# Altium PCB Game of Simon.PcbDoc
Units mm, origin at the board's own origin, x right, y up, seen from the top; angles counter-clockwise.
Board outline 80 x 49 mm, 2 copper layers (Top Layer, Bottom Layer), stack 1.671 mm thick; 15 components, 14 nets, 77 pads, 1 vias.
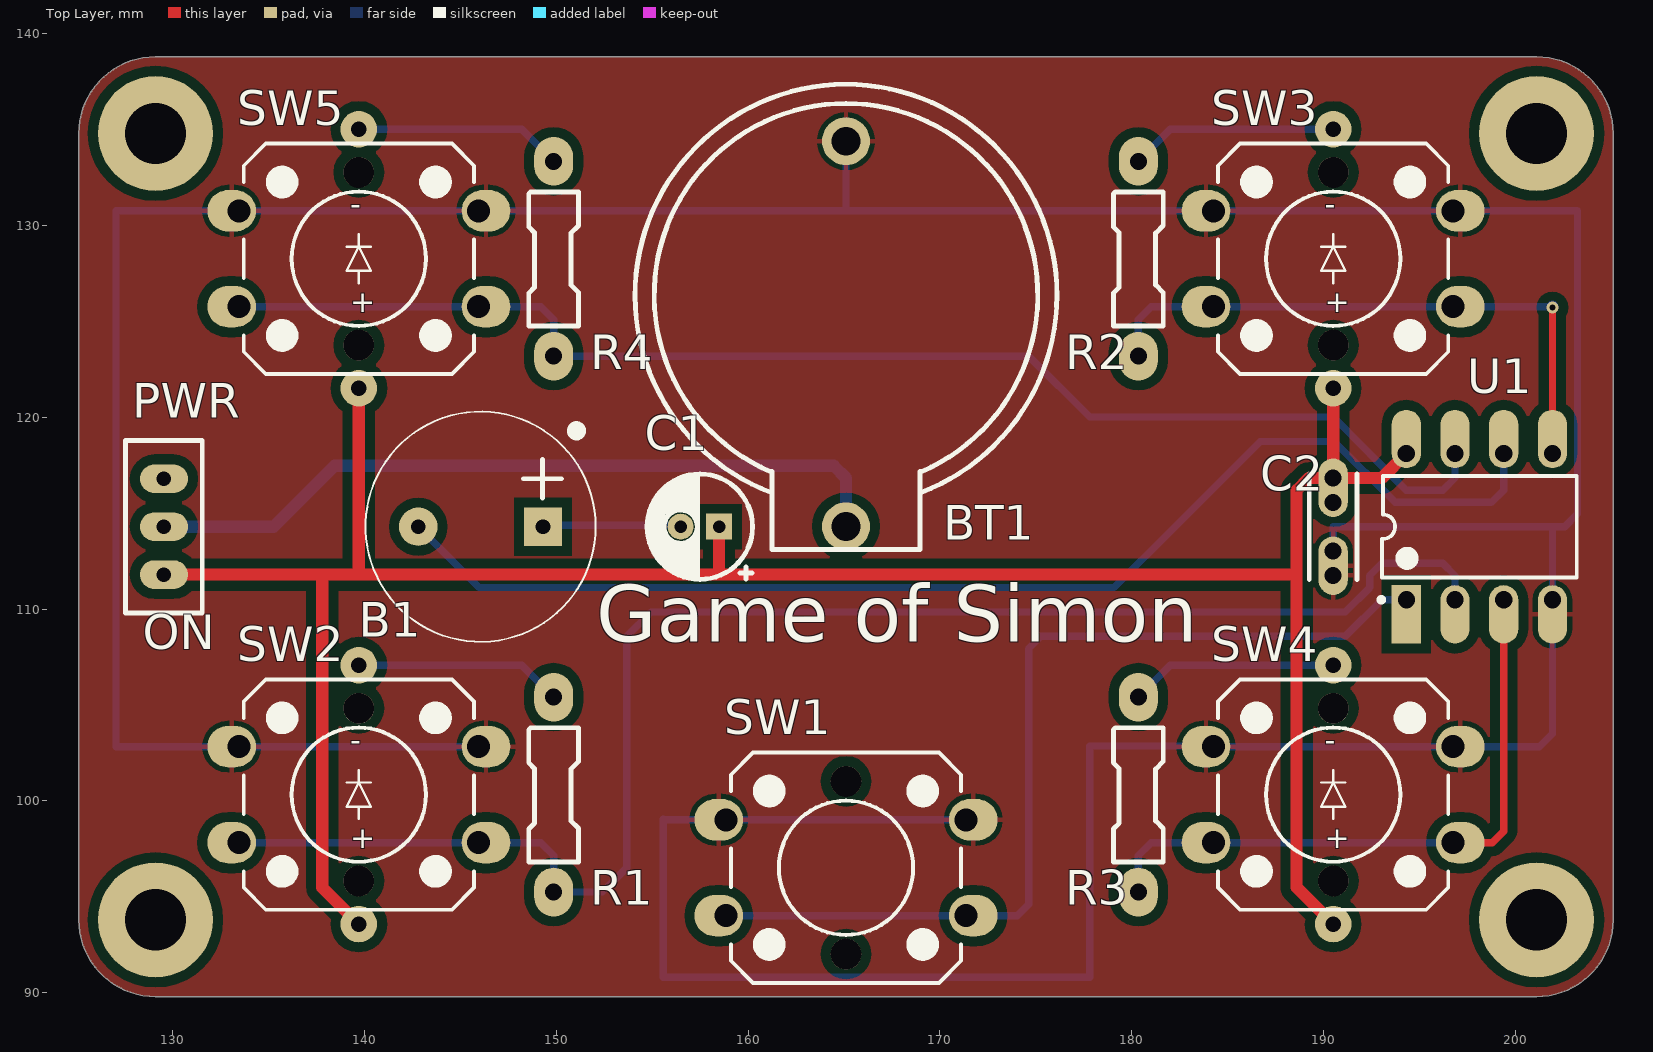
[diagram p0: Top Layer view]
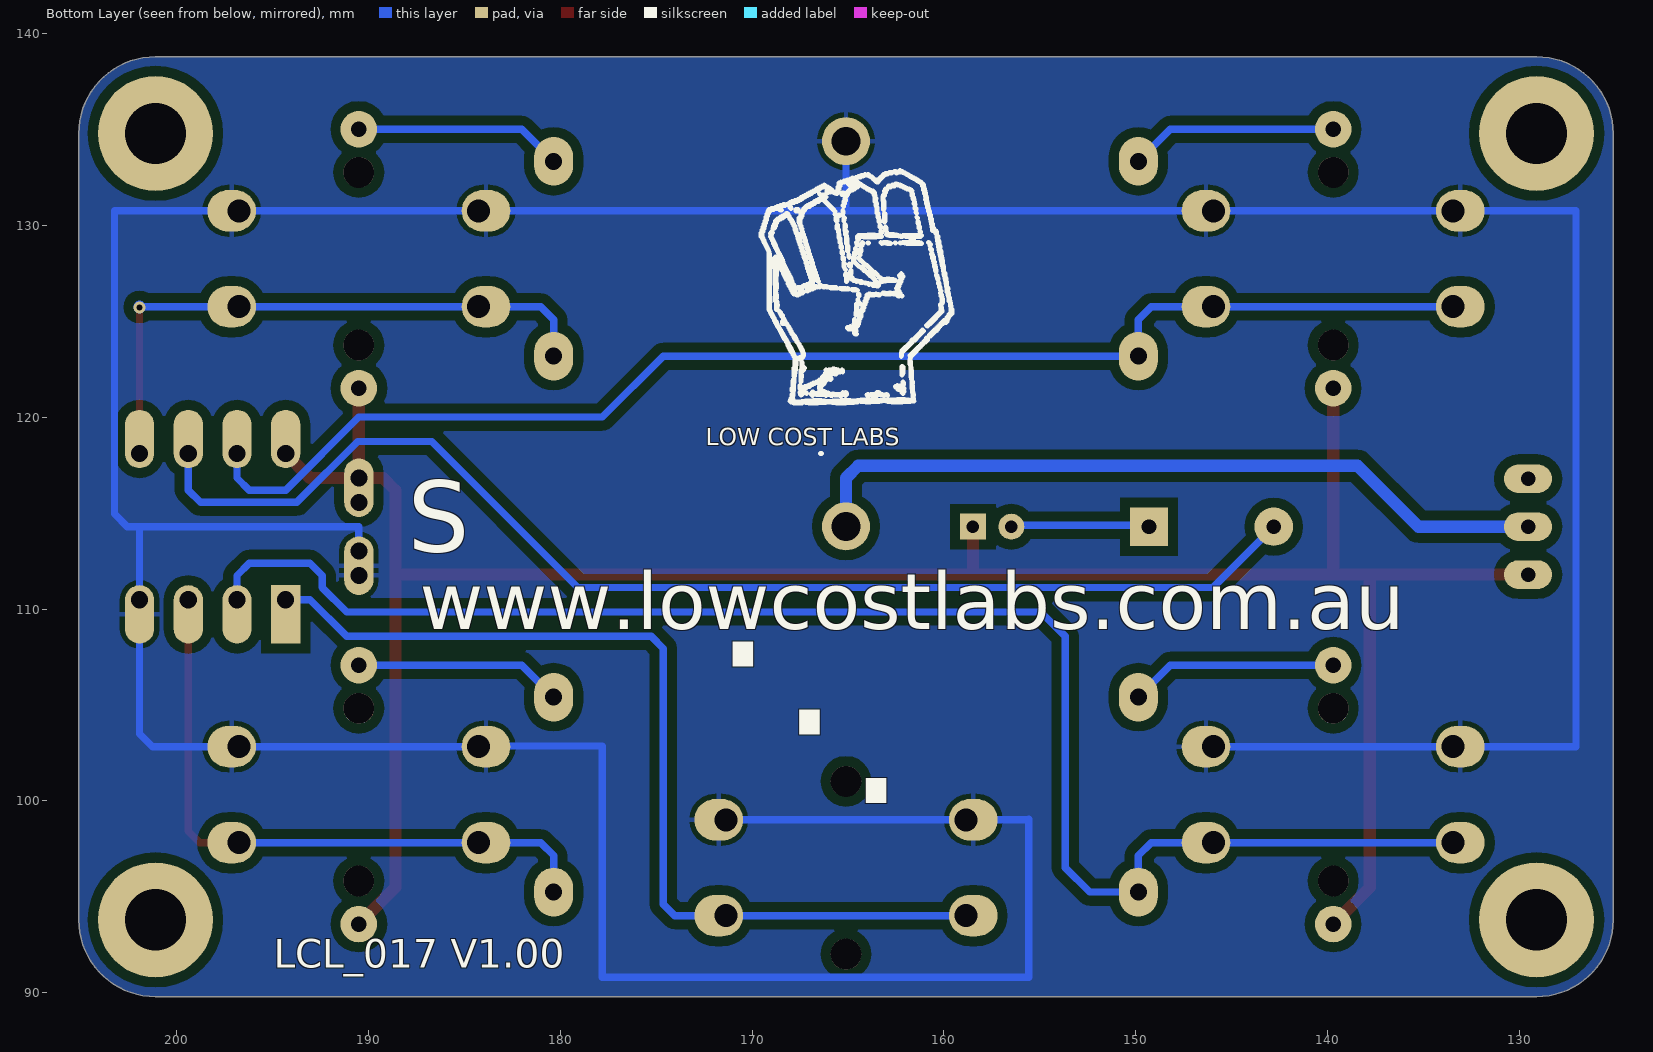
[diagram p1: Bottom Layer view, seen from below]
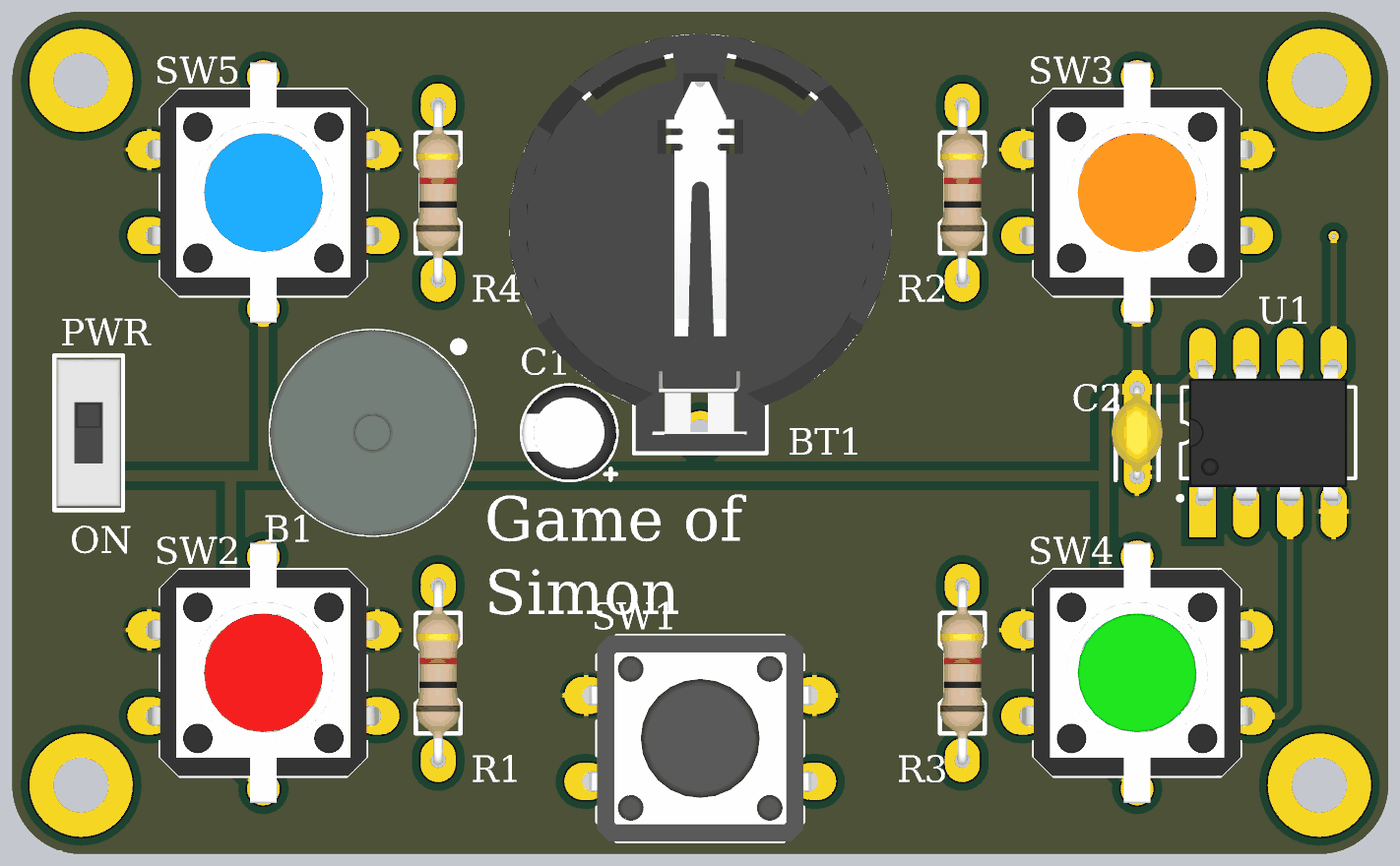
[diagram p2: 3D render of the assembled board from above, using the file's embedded part models]

## Layer stack, top to bottom
Top Solder: solder mask 0.0102, Solder Resist, Dk 3.5
Top Layer: signal copper 0.0356
Dielectric 1: dielectric 1.6, FR-4, Dk 4.8
Bottom Layer: signal copper 0.0356
Bottom Solder: solder mask 0.0102, Solder Resist, Dk 3.5

## Board outline
125.1,93.8 ccw(c129.1,93.8) 129.1,89.8 201.1,89.8 ccw(c201.1,93.8) 205.1,93.8 205.1,134.8 ccw(c201.1,134.8) 201.1,138.8 129.1,138.8 ccw(c129.1,134.8) 125.1,134.8

## Design rules (kind name [scope] priority, off if disabled: settings)
Clearance Poly_GND [inPolygon vs not innet (gnd)] p1: gap=0.508
Clearance [All] p2: gap=0.203
HoleSize [All] p1 off: absolutevalues=TRUE maxlimit=2.54 minlimit=0.025 maxpercent=80.000 minpercent=20.000
HoleSize Testpoint [All] p2 off: absolutevalues=TRUE maxlimit=2.54 minlimit=0.025 maxpercent=80.000 minpercent=20.000
HoleSize TestPointUsage [All] p3 off: absolutevalues=TRUE maxlimit=2.54 minlimit=0.025 maxpercent=80.000 minpercent=20.000
HoleToHoleClearance [All] p1 off: gap=0.254 allowstackedmicrovias=TRUE
LayerPairs [All] p1 off: enforce=TRUE
MinimumSolderMaskSliver [All] p1 off: minsoldermaskwidth=0.254
MinimumSolderMaskSliver SilkscreenOverComponentPads [All] p2 off: minsoldermaskwidth=0.254
NetAntennae [All] p1 off: netantennaetolerance=0
PolygonConnect [All] p1: connectstyle=Relief reliefconductorwidth=0.254 reliefentries=4 polygonreliefangle="90 Angle" airgapwidth=0.254
RoomDefinition U_PSU [InComponentClass('U_PSU')] p1: confinementstyle=ConfineIn formatcopy=TRUE lockcomponents=FALSE outline 25,25 105,25 105,75 25,75
RoomDefinition U_Peripherals [InComponentClass('U_Peripherals')] p2: confinementstyle=ConfineIn formatcopy=TRUE lockcomponents=FALSE outline 25,25 105,25 105,75 25,75
RoomDefinition U_Micro [InComponentClass('U_Micro')] p3: confinementstyle=ConfineIn formatcopy=TRUE lockcomponents=FALSE outline 25,25 105,25 105,75 25,75
RoomDefinition U_Bus [InComponentClass('U_Bus')] p4: confinementstyle=ConfineIn formatcopy=TRUE lockcomponents=FALSE outline 25,25 105,25 105,75 25,75
RoomDefinition "4 Button Plate" [InComponentClass('4 Button Plate')] p5: confinementstyle=ConfineIn formatcopy=TRUE lockcomponents=FALSE outline 25,25 105,25 105,75 25,75
RoutingVias [All] p1: holewidth=0.305 width=0.61 viastyle="Through Hole" minholewidth=0.305 minwidth=0.61 maxholewidth=0.711 maxwidth=1.27
SilkToSilkClearance [All] p1 off: silktosilkclearance=0.254
SilkToSolderMaskClearance [IsPad] p1 off: minsilkscreentomaskgap=0.254 clearancetoexposedcopper=TRUE
SolderMaskExpansion [All] p1: expansion=0.102
Width Standard [All] p1: maxlimit=0.635 minlimit=0.203 preferedwidth=0.203
Width Power [inNet('VIN')] p2: maxlimit=2.54 minlimit=0.203 preferedwidth=0.635
23 further rules are at their usual default settings.

## Components (designator, comment, footprint, x,y, rotation, side; value= is the part's Value field where it differs from the comment)
B1 "42R" BUZZER 146.05,114.3 r270 top
BT1 "CR2032 Battery Holder" "CR2032 HOLDER" 165.1,126.365 r270 top
C1 "10uF" "CAP ELECTRO 5mm" 157.48,114.3 r180 top
C2 "10nF" "CAP 0.100\"" 190.5,114.3 r270 top
PWR "SS12D00G3" SS12D00G3 129.54,114.3 r270 top
R1 "1k" "RESISTOR 0.400\"" 149.86,100.33 r270 top
R2 "1k" "RESISTOR 0.400\"" 180.34,128.27 r270 top
R3 "1k" "RESISTOR 0.400\"" 180.34,100.33 r270 top
R4 "1k" "RESISTOR 0.400\"" 149.86,128.27 r270 top
SW1 "12MM TACT SWITCH" "12mm TACT THROUGH HOLE" 165.1,96.52 r0 top
SW2 "TACT RED" "ILLUMINATED TACT RED" 139.7,100.33 r0 top
SW3 "TACT ORANGE" "ILLUMINATED TACT ORANGE" 190.5,128.27 r0 top
SW4 "TACT GREEN" "ILLUMINATED TACT GREEN" 190.5,100.33 r0 top
SW5 "TACT BLUE" "ILLUMINATED TACT BLUE" 139.7,128.27 r0 top
U1 "ATTINY13-20SSU" DIP-8 198.12,114.3 r90 top

## Footprints (in the part's own frame and the unit in brackets; to place one, negate y for a bottom-side part, rotate by r counter-clockwise, add the part's x,y. Pads: shape width x height; smd on the part's side, far side on the other; paste and mask are expansions set on the pad)
"12mm TACT THROUGH HOLE" [mil] "12mm TACT THROUGH HOLE"
  oval 100x85 hole 47.24 copper offset -15,0: 1(-246.06,98.43) 2(-246.06,-98.43)
  oval 100x85 hole 47.24 copper offset 15,0: 1(246.06,98.43) 2(246.06,-98.43)
  round 62.99 hole 62.99: MOUNT(0,-177.17) MOUNT(0,177.17)
  silkscreen extent -236,-236 236,236, body extent -273,-236 273,236, height 335
BUZZER [mm]
  rect 2x2 hole 0.762: 1(0,3.25)
  round 2 hole 0.762: 2(0,-3.25)
  silkscreen extent -6,-6 6,6, body extent -6,-6 6,6, height 8.51
"CAP 0.100\"" [mil]
  round 60 hole 35: 1(-99.99,0) 2(100.01,0)
  oval 120x60 hole 35 copper offset -30,0: 1(-49.99,0)
  oval 120x60 hole 35 copper offset 30,0: 2(50.01,0)
  silkscreen extent -108,-49 108,49, body extent -107,-59 107,59, height 176
"CAP ELECTRO 5mm" [mm]
  rect 1.35x1.35 hole 0.65: 1(-1,0)
  round 1.35 hole 0.65: 2(1,0)
  silkscreen extent -2.75,-2.75 2.75,2.75, body extent -2.75,-2.75 2.75,2.75, height 12.5
"CR2032 HOLDER" [mm]
  round 2.5 hole 1.5: 1(12.05,0) 2(-8.035,0)
  silkscreen extent -11,-11 13.25,11, body extent -11.15,-11.15 13.15,11.15, height 8.5
DIP-8 [mil] "DIP, 14-Pin, Row Spacing 7.62 mm, Pitch 2.54 mm"
  rect 120x60 hole 35 copper offset -30,0: 1(-150,150)
  rrect100% 120x60 hole 35.43 copper offset -30,0: 2(-150,50) 3(-150,-50) 4(-150,-150)
  rrect100% 120x60 hole 35.43 copper offset 30,0: 5(150,-150) 6(150,-50) 7(150,50) 8(150,150)
  silkscreen extent -155,-200 104,206, body extent -155,-181 155,181, height 152
"ILLUMINATED TACT BLUE" [mil]
  oval 100x85 hole 47.24 copper offset -15,0: 1(-246.06,98.43) 2(-246.06,-98.43)
  oval 100x85 hole 47.24 copper offset 15,0: 1(246.06,98.43) 2(246.06,-98.43)
  round 75 hole 31.5: A(0,265.75) K(0,-265.75)
  round 62.99 hole 62.99: MOUNT(0,-177.17) MOUNT(0,177.17)
  silkscreen extent -236,-236 236,236, body extent -264,-298 264,298, height 290
"ILLUMINATED TACT GREEN" [mil]
  oval 100x85 hole 47.24 copper offset -15,0: 1(-246.06,98.43) 2(-246.06,-98.43)
  oval 100x85 hole 47.24 copper offset 15,0: 1(246.06,98.43) 2(246.06,-98.43)
  round 75 hole 31.5: A(0,265.75) K(0,-265.75)
  round 62.99 hole 62.99: MOUNT(0,-177.17) MOUNT(0,177.17)
  silkscreen extent -236,-236 236,236, body extent -264,-298 264,298, height 290
"ILLUMINATED TACT ORANGE" [mil]
  oval 100x85 hole 47.24 copper offset -15,0: 1(-246.06,98.43) 2(-246.06,-98.43)
  oval 100x85 hole 47.24 copper offset 15,0: 1(246.06,98.43) 2(246.06,-98.43)
  round 75 hole 31.5: A(0,265.75) K(0,-265.75)
  round 62.99 hole 62.99: MOUNT(0,-177.17) MOUNT(0,177.17)
  silkscreen extent -236,-236 236,236, body extent -264,-299 264,298, height 290
"ILLUMINATED TACT RED" [mil]
  oval 100x85 hole 47.24 copper offset -15,0: 1(-246.06,98.43) 2(-246.06,-98.43)
  oval 100x85 hole 47.24 copper offset 15,0: 1(246.06,98.43) 2(246.06,-98.43)
  round 75 hole 31.5: A(0,265.75) K(0,-265.75)
  round 62.99 hole 62.99: MOUNT(0,-177.17) MOUNT(0,177.17)
  silkscreen extent -236,-236 236,236, body extent -264,-299 264,298, height 290
"RESISTOR 0.400\"" [mil]
  oval 100x80 hole 35: 1(-200,0) 2(200,0)
  silkscreen extent -137,-51 138,51, body extent -211,-51 211,51, height 106
SS12D00G3 [mm] "SS12D00G3 TOGGLE SWITCH"
  oval 1.5x2.5 hole 0.75: 1(-2.5,0) 2(0,0) 3(2.5,0)
  silkscreen extent -4.5,-2 4.5,2, body extent -4.29,-1.85 4.29,1.85, height 6.97

## Part data
B1: library part BUZZER
BT1: library part CMP-dvcba8mzfnv4aqscf1uc-2, "CR2032 Battery Holder, Through Hole, Horizontal Mount"
C1: library part CMP-su2zmkw1kc3z49ns9isd-1, "5mm Through Hole Electrolytic 2mm Pitch, 5mm height"
C2: library part CMP-f9eb30fd1b76262c-1, "Capacitor, Ceramic, 10000pF, 50VDC, 20-% Tol, 20+% Tol, X7R-TC Code, -15, 15%-TC"
PWR: library part "SS12D00G3 Toggle Switch", "SS12D00G3 Toggle Switch"
R1 R2 R3 R4: library part CMP-iaxfckaaxq3jb0c9euu5-1, "RESISITOR THROUGH HOLE 1/4W"
SW2: "12mm TACT SWITCH RED"
SW3: "12mm TACT SWITCH ORANGE"
SW4: "12mm TACT SWITCH GREEN"
SW5: "ILLUMINATED 12MM TACT SWITCH (BLUE)"
U1: "ATtiny Series 20 MHz 1 KB Flash 64 B SRAM 8-Bit Microcontroller - SOIC-8"

## Free pads (board coordinates)
  round 0.254 on Mech16: 1(294.185,23.293) 1(294.185,23.293) 1(294.199,21.335) 1(294.199,21.335) 1(298.943,25.015) 1(298.943,25.015)
  round 6 hole 3.2: MOUNT(129.1,93.8) MOUNT(129.1,134.8) MOUNT(201.1,93.8) MOUNT(201.1,134.8)

## Via types
v1: diameter 0.61, hole 0.305, Top Layer to Bottom Layer, 1 vias

## Nets (pads, with @x,y where several pads share a name; then routed paths per layer and width w, separated by ;. In a path a pad name is that pad's centre, name@x,y a point inside that pad or via, vN(x,y) a via of type N, cw(c..) or ccw(c..) an arc to the next point about the centre after c; other vN are vias at no path point)
BLUE: R4.2 SW5.2 U1.7 | length 70
  Bottom Layer w0.381: SW5.2@133.45,125.77 145.95,125.77 149.185,125.77 149.86,125.095 R4.2 174.625,123.19 177.8,120.015 190.5,120.015 194.31,116.205 196.215,116.205 196.85,116.84 U1.7
BUZZER: B1.2 U1.6 | length 64.6
  Bottom Layer w0.381: B1.2@142.875,114.3 B1.2 145.975,111.125 179.07,111.125 186.69,118.745 190.555,118.745 193.73,115.57 198.755,115.57 199.39,116.205 U1.6
GND: BT1.2 C2.2 SW1.1 SW2.1 SW3.1 SW4.1 SW5.1 U1.4 | length 250.3
  Bottom Layer w0.381: SW2.1@145.95,102.83 133.45,102.83 127.04,102.83 127.04,130.77 133.45,130.77 145.95,130.77 165.1,130.77 ; BT1.2 165.1,130.77 ; SW1.1@171.35,99.02 158.85,99.02 155.615,99.02 155.575,99.06 155.575,90.805 177.8,90.805 177.8,102.87 184.21,102.87 184.25,102.83 196.75,102.83 201.255,102.83 201.93,103.505 U1.4 201.93,114.3 ; C2.2@190.5,113.03 190.5,114.3 201.93,114.3 ; 165.1,130.77 184.25,130.77 196.75,130.77 203.24,130.77 203.24,114.975 202.565,114.3 201.93,114.3
GREEN: R3.2 SW4.2 U1.3 | length 33.5
  Top Layer w0.381: SW4.2@196.75,97.83 198.795,97.83 199.39,98.425 U1.3
  Bottom Layer w0.381: R3.2 180.34,97.155 181.015,97.83 184.25,97.83 SW4.2@196.75,97.83
NetB1_1: B1.1 C1.2 | length 7.2
  Bottom Layer w0.381: B1.1@149.273,114.379 156.401,114.379 C1.2
NetBT1_1: BT1.1 PWR.2 | length 39.7
  Bottom Layer w0.635: PWR.2 135.255,114.3 138.43,117.475 164.465,117.475 165.1,116.84 BT1.1
NetR1_1: R1.1 SW2.A | length 10.9
  Bottom Layer w0.381: SW2.A 148.19,107.08 R1.1
NetR2_1: R2.1 SW3.A | length 10.9
  Bottom Layer w0.381: R2.1 182.01,135.02 SW3.A
NetR3_1: R3.1 SW4.A | length 10.9
  Bottom Layer w0.381: R3.1 182.01,107.08 SW4.A
NetR4_1: R4.1 SW5.A | length 10.9
  Bottom Layer w0.381: SW5.A 148.19,135.02 R4.1
ORANGE: R2.2 SW3.2 U1.5 | length 31.4
  Top Layer w0.381: U1.5 v1(201.93,125.73)
  Bottom Layer w0.381: R2.2 180.34,125.095 181.015,125.77 184.25,125.77 196.75,125.77 v1@201.93,125.77
  Bottom Layer w0.635: v1(201.93,125.73) v1@201.93,125.77
RED: R1.2 SW2.2 U1.2 | length 81.7
  Bottom Layer w0.381: SW2.2@133.45,97.83 145.95,97.83 149.185,97.83 149.86,97.155 R1.2 152.4,95.25 153.67,96.52 153.67,108.585 154.94,109.855 191.135,109.855 192.405,111.125 192.405,111.76 193.04,112.395 196.215,112.395 196.85,111.76 U1.2
START: SW1.2 U1.1 | length 50.1
  Bottom Layer w0.381: SW1.2@158.85,94.02 171.35,94.02 174.03,94.02 174.625,94.615 174.625,107.95 175.26,108.585 191.135,108.585 193.04,110.49 U1.1
VCC: C1.1 C2.1 PWR.3 SW2.K SW3.K SW4.K SW5.K U1.8 | length 125.5
  Top Layer w0.635: PWR.3 137.795,111.8 ; SW2.K 137.795,95.485 137.795,111.8 ; 139.7,111.8 SW5.K ; C1.1 158.48,111.8 ; SW4.K 188.595,95.485 188.595,111.84 ; SW3.K@190.5,121.52 C2.1@190.5,116.84 ; U1.8 193.04,116.84 C2.1@190.5,116.84 ; 137.795,111.8 158.48,111.8 ; 158.48,111.8 188.555,111.8 188.595,111.84 ; 188.595,111.84 188.595,116.205 189.23,116.84 189.865,116.84 C2.1@190.5,116.84
  Bottom Layer w0.635: U1.8 U1.8@194.31,118.745
pads on no net: PWR.1 SW1.MOUNT SW2.MOUNT SW3.MOUNT SW4.MOUNT SW5.MOUNT

## Polygon pours and split planes (outlines as drawn)
GND on Top Layer "TOP GND" (solid, remove dead copper, pour order 0): 125.1,93.8 ccw(c129.1,93.8) 129.1,89.8 201.1,89.8 ccw(c201.1,93.8) 205.1,93.8 205.1,134.8 ccw(c201.1,134.8) 201.1,138.8 129.1,138.8 ccw(c129.1,134.8) 125.1,134.8
GND on Bottom Layer "BOTTOM GND" (solid, pour order 1): 125.1,93.8 ccw(c129.1,93.8) 129.1,89.8 201.1,89.8 ccw(c201.1,93.8) 205.1,93.8 205.1,134.8 ccw(c201.1,134.8) 201.1,138.8 129.1,138.8 ccw(c129.1,134.8) 125.1,134.8

## Silkscreen, mask and mechanical layers (free items; w line width, h text height)
Top Overlay:
  text "ON" at 128.444,107.315 h3.05
  text "Game of Simon" at 152.091,107.315 h5.08
Bottom Overlay:
  drawing of 3736 lines, arcs and shapes, not listed
  text "LOW COST LABS" at 172.412,118.237 h1.52
  text "S" at 187.96,111.76 h6.35
  text "www.lowcostlabs.com.au" at 187.325,107.95 h5.08
  text "⋱" at 172.212,97.917 h15.24
  text "LCL_017 V1.00" at 194.945,90.805 h2.54
Mechanical 1:
  the board outline again, w0.254
Mechanical 32:
  drawing of 655 lines, arcs and shapes, not listed
  text "1" at 47.1,215.8 h2.54
  text "2" at 130.1,215.8 h2.54
  text "3" at 205.1,215.8 h2.54
  text "4" at 276.6,215.8 h2.54
  text "A" at 18.6,192.8 h2.54
  text "A" at 310.6,192.8 h2.54
  text "B" at 18.1,139.8 h2.54
  text "B" at 310.1,139.8 h2.54
  text "C" at 18.6,85.8 h2.54
  text "C" at 310.6,85.8 h2.54
  text "D" at 18.6,31.8 h2.54
  text "D" at 310.6,31.8 h2.54
  text "LOW COST LABS" at 233.6,30.3 h2.54
  text "TITLE: Game of Simon" at 200.1,24.8 h2.54
  text "ludzinc.blogspot.com.au" at 259.715,24.13 h2.54
  text "SIZE: A4" at 200.1,20.3 h2.54
  text "Number: LCL_017" at 221.1,20.3 h2.54
  text "Revison 1.00" at 241.1,20.3 h2.54
  text "www.lowcostlabs.com.au" at 260.1,20.3 h2.54
  text "DATE:" at 200.1,17.3 h2.54
  text ".Print_Date" at 206.1,17.3 h2.54
  text "SHEET 1 of 1" at 241.1,17.3 h2.54
  text "FILE:" at 200.1,14.8 h2.54
  text ".Pcb_File_Name" at 206.1,14.8 h2.54
  text "S" at 21.6,14.3 h2.54
  text "1" at 47.1,11.3 h2.54
  text "2" at 130.1,11.3 h2.54
  text "3" at 205.1,11.3 h2.54
  text "4" at 276.6,11.3 h2.54

## Text inside footprints (layer, text, board x,y; h text height)
SW2: Top Overlay "-" at 139.256,102.235 h1.97; Top Overlay "+" at 139.256,97.155 h1.97
SW3: Top Overlay "+" at 190.056,125.095 h1.97; Top Overlay "-" at 190.056,130.175 h1.97
SW4: Top Overlay "-" at 190.056,102.235 h1.97; Top Overlay "+" at 190.056,97.155 h1.97
SW5: Top Overlay "+" at 139.256,125.095 h1.97; Top Overlay "-" at 139.256,130.175 h1.97